# Altium PCB 电源控制板.PcbDoc
Units mil, origin at the board's own origin, x right, y up, seen from the top; angles counter-clockwise.
Board outline 3890 x 2720 mil, 2 copper layers (Top Layer, Bottom Layer); 36 components, 24 nets, 214 pads, 29 vias.
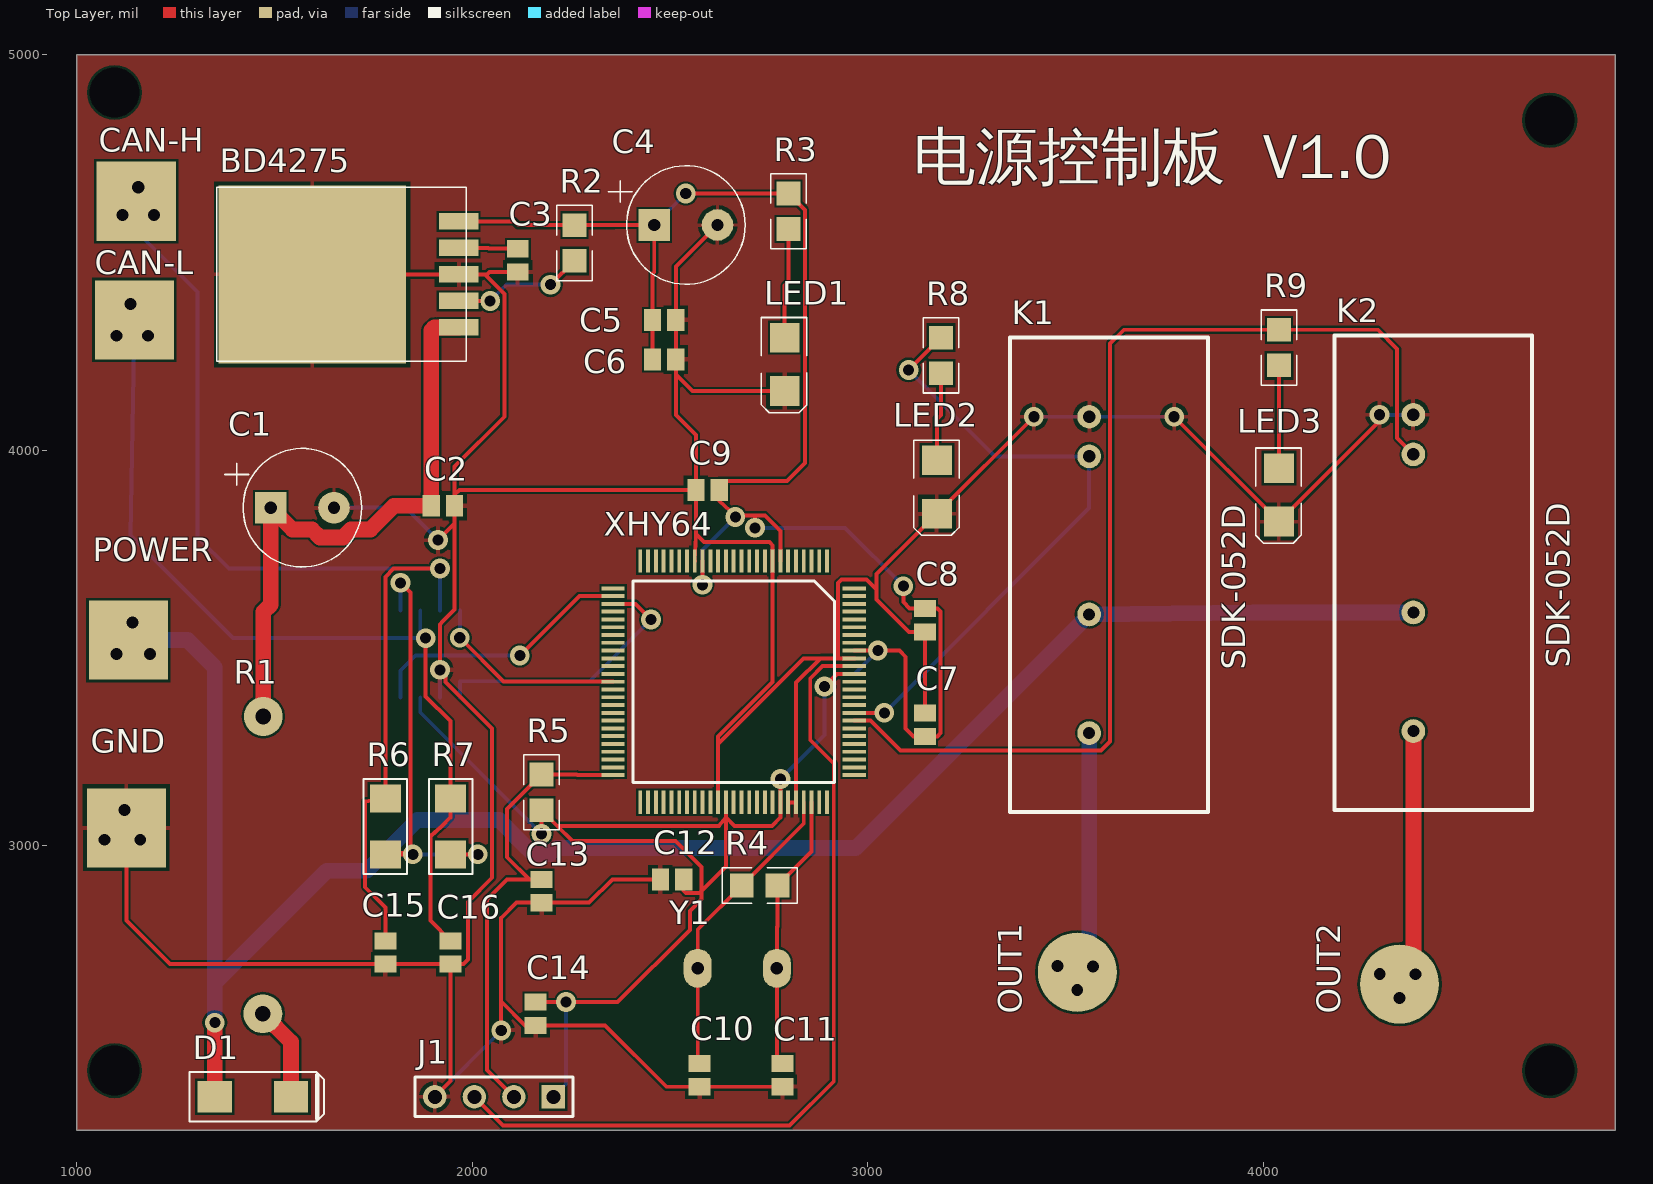
[diagram p0: Top Layer view]
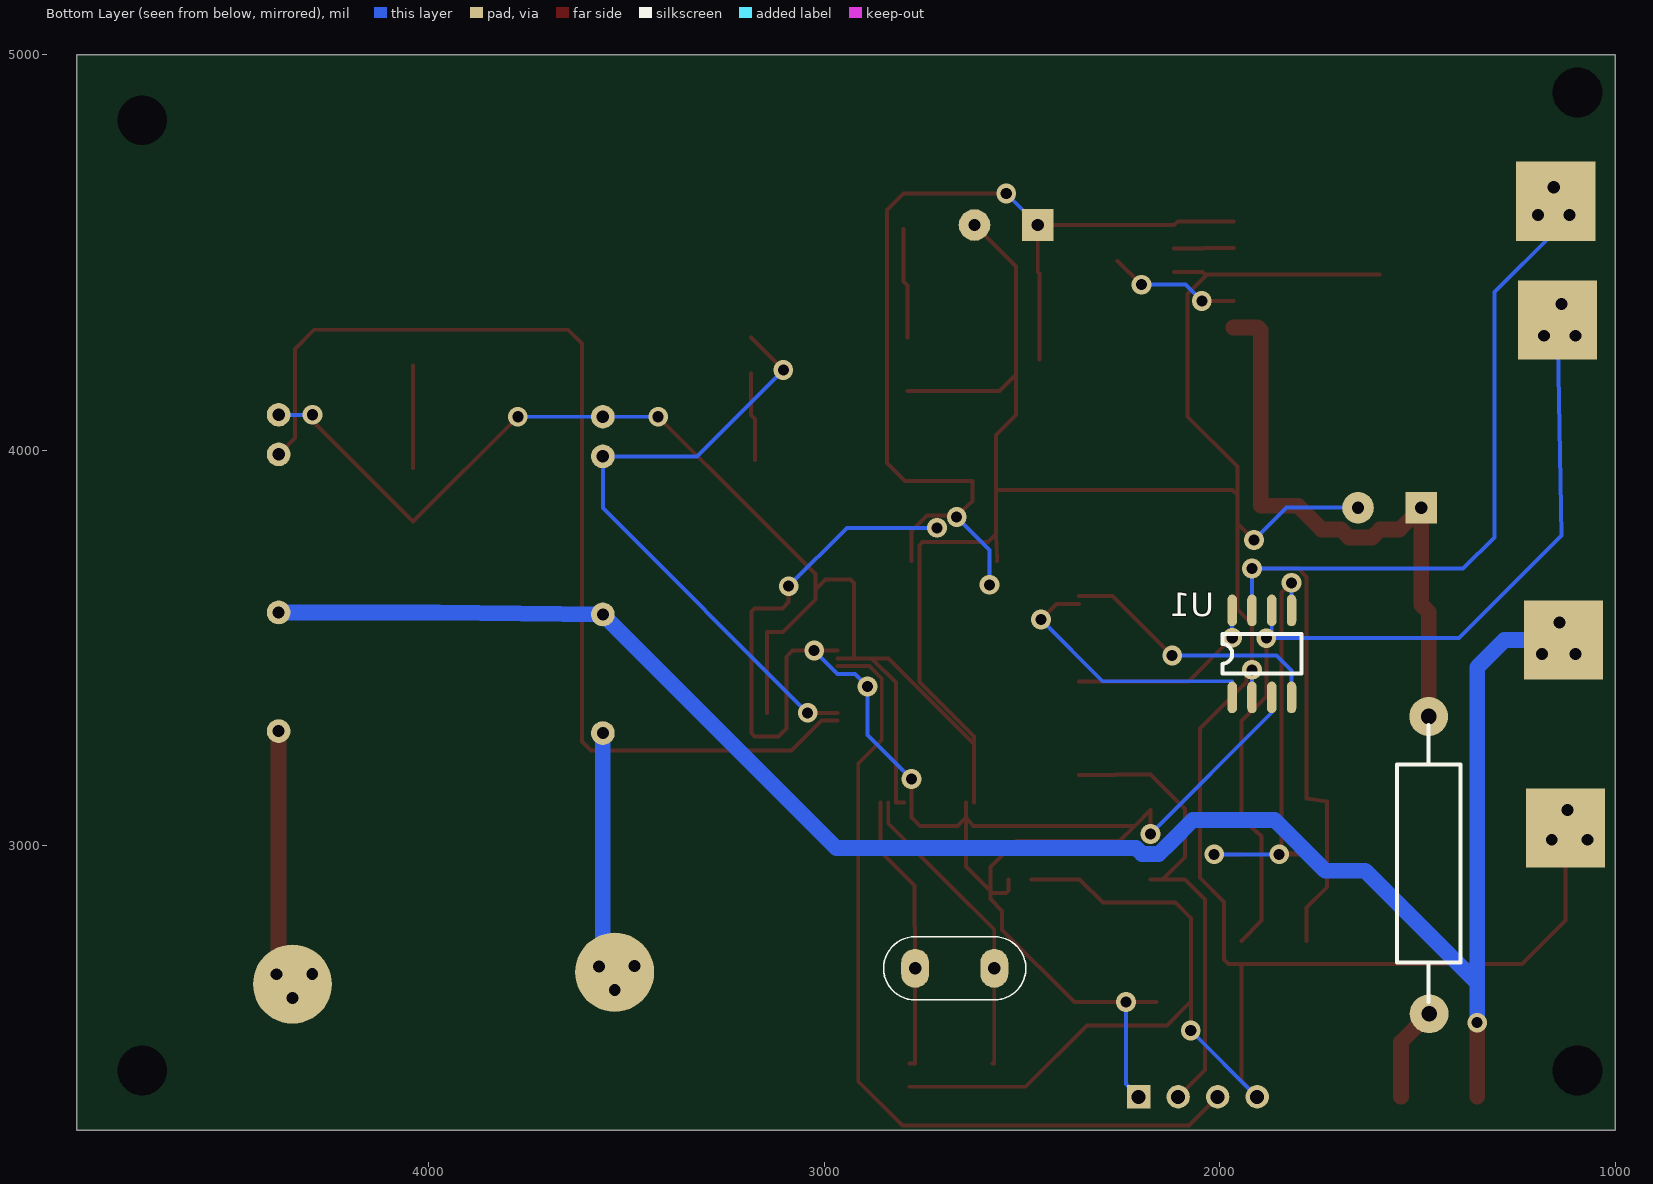
[diagram p1: Bottom Layer view, seen from below]

## Layer stack, top to bottom
Top Solder: solder mask 0.4, Solder Resist, Dk 3.5
Top Layer: signal copper 1.4
Dielectric 1: dielectric 12.6, FR-4, Dk 4.8
Bottom Layer: signal copper 1.4
Bottom Solder: solder mask 0.4, Solder Resist, Dk 3.5

## Board outline
1000,5000 1000,2280 4890,2280 4890,5000

## Design rules (kind name [scope] priority, off if disabled: settings)
Clearance [All] p1: gap=6 ignorepadtopadclearanceinfootprint=TRUE except(5.98: Arc-Text Arc-Hole Track-Text Track-Hole SMDPad-Hole THPad-Hole Via-Hole Fill-Hole Poly-Hole Region-Hole Text-Hole)
HoleSize [All] p1: absolutevalues=TRUE maxlimit=150 minlimit=1 maxpercent=80.000 minpercent=20.000
HoleToHoleClearance [All] p1: gap=5 allowstackedmicrovias=TRUE
MinimumSolderMaskSliver [All] p1: minsoldermaskwidth=1
PolygonConnect [All] p1: connectstyle=Relief reliefconductorwidth=10 reliefentries=4 polygonreliefangle="90 Angle" airgapwidth=10
RoutingVias [All] p1: holewidth=28 width=50 viastyle="Through Hole" minholewidth=28 minwidth=50 maxholewidth=28 maxwidth=50
SilkToSilkClearance [All] p1: silktosilkclearance=5
SilkToSolderMaskClearance [IsPad] p1 off: minsilkscreentomaskgap=4 clearancetoexposedcopper=TRUE
SolderMaskExpansion [All] p1: expansion=4
Width [All] p1: maxlimit=80 minlimit=10 preferedwidth=10
25 further rules are at their usual default settings.

## Components (designator, comment, footprint, x,y, rotation, side; value= is the part's Value field where it differs from the comment)
BD4275 "BD4275" TO-263 1935.03,4445.5 r0 top
C1 "100UF/50V" RB.1/.25 1490,3855 r0 top
C2 "104" C0805 1925.47,3860 r180 top value=50V-104-0805
C3 "104" C0805 2115,4480.47 r90 top value=50V-104-0805
C4 "470UF/16V" RB.1/.25 2460,4570 r0 top
C5 "104" C0805 2485,4330 r180 top value=50V-104-0805
C6 "104" C0805 2485,4230 r180 top value=50V-104-0805
C7 "104" C0805 3145,3306.3 r90 top value=50V-104-0805
C8 "104" C0805 3145,3570.47 r270 top value=50V-104-0805
C9 "104" C0805 2595,3900 r0 top value=50V-104-0805
C10 "22P" C0805 2574.61,2420 r90 top value=50V-22P-0805
C11 "22P" C0805 2784.61,2420 r270 top value=50V-22P-0805
C12 "104" C0805 2505,2915 r180 top value=50V-104-0805
C13 "104" C0805 2175,2885.47 r90 top value=50V-102-0805
C14 "104" C0805 2160,2575 r90 top value=50V-104-0805
C15 "47P-100V" C0805 1780,2730 r90 top value=100V-47P-0805
C16 "47P-100V" C0805 1945,2730 r90 top value=100V-47P-0805
D1 "M7" M7-A 1445,2365 r0 top
J1 "SPI4" HDR1X4 2205,2365 r180 top
K1 "SDK-052D" SDK-052D 3560,4085 r0 top
K2 "SDK-052D" SDK-052D 4380,4090 r0 top
LED1 "R" 1206-2 2790,4150 r90 top
LED2 "R" 1206-2 3175,3840 r90 top
LED3 "R" 1206-2 4040,3820 r90 top
R1 "8R2-2W" 2WR 1471.2,2555.1 r270 top
R2 "4K7" 0805 2258.44,4479.72 r90 top value="4K7-0805- 5%"
R3 "510Ω" 0805_2 2800,4560 r90 top value="510-0805- 5%"
R4 "1M" 0805 2771.26,2900 r180 top value=1M-0805-5%
R5 "10K" 0805 2174.61,3179.72 r270 top value=10K-0805-5%
R6 "62R-J" 1206 1780,3049.13 r90 top value=62R-1206-1%
R7 "62R-J" 1206 1945,3049.13 r90 top value=62R-1206-1%
R8 "1KΩ" 0805_2 3185.39,4195.28 r90 top value="1KΩ-0805- 5%"
R9 "1KΩ" 0805_2 4040.39,4215.28 r90 top value="1KΩ-0805- 5%"
U1 "TJA1040" SO-8 1895,3555 r90 top
XHY64 "XHY64" QUAD100 2897.16,3720 r270 top
Y1 "4M" 16M 2570,2690 r90 top

## Footprints (in the part's own frame and the unit in brackets; to place one, negate y for a bottom-side part, rotate by r counter-clockwise, add the part's x,y. Pads: shape width x height; smd on the part's side, far side on the other; paste and mask are expansions set on the pad)
2WR [mm]
  round 2.5 hole 1: 1(-0.505,-0.03) 2(-19.604,0)
16M [mm]
  oval 2.5x1.8 hole 0.8: 12(0,0) 13(0,-5.08)
0805 [mil]
  rect 60x60 smd: 1(-0.28,0.39) 2(89.72,0.39)
  silkscreen extent -50,-45 140,45
0805_2 [mil]
  rect 60x60 smd: 1(-0.28,0.39) 2(89.72,0.39)
  silkscreen extent -50,-45 140,45
1206 [mm]
  rect 1.8x2 smd: 1(-1.8,0) 2(1.8,0)
  silkscreen extent -3.05,-1.4 3.05,1.4
1206-2 [mil]
  rect 75x75 smd: 5(135,0) 6(0,0)
  silkscreen extent -55,-56 186,59
C0805 [mm] "Chip Capacitor, Body 2.0x1.3mm, IPC High Density"
  rect 1.1x1.4 smd: 1(-0.75,0) 2(0.75,0)
  body extent -1.1,-0.72 1.1,0.72, height 1.4
HDR1X4 [mm] "Connector; Header; 4 Position"
  rect 1.5x1.5 hole 0.9: 1(0,0)
  round 1.5 hole 0.9: 2(2.54,0) 3(5.08,0) 4(7.62,0)
  silkscreen extent -1.27,-1.27 8.89,1.27
M7-A [mm]
  rect 2.2x2 smd: 1(-2.45,0) 2(2.45,0)
  silkscreen extent -4.06,-1.6 4.57,1.6
QUAD100 [mm]
  rect 1.5x0.25 smd: 1(0,0) 2(0,-0.5) 3(0,-1) 4(0,-1.5) 5(0,-2) 6(0,-2.5) 7(0,-3) 8(0,-3.5) 9(0,-4) 10(0,-4.5) 11(0,-5) 12(0,-5.5) 13(0,-6) 14(0,-6.5) 15(0,-7) 16(0,-7.5) 17(0,-8) 18(0,-8.5) 19(0,-9) 20(0,-9.5) 21(0,-10) 22(0,-10.5) 23(0,-11) 24(0,-11.5) 25(0,-12) 51(15.5,-12) 52(15.5,-11.5) 53(15.5,-11) 54(15.5,-10.5) 55(15.5,-10) 56(15.5,-9.5) 57(15.5,-9) 58(15.5,-8.5) 59(15.5,-8) 60(15.5,-7.5) 61(15.5,-7) 62(15.5,-6.5) 63(15.5,-6) 64(15.5,-5.5) 65(15.5,-5) 66(15.5,-4.5) 67(15.5,-4) 68(15.5,-3.5) 69(15.5,-3) 70(15.5,-2.5) 71(15.5,-2) 72(15.5,-1.5) 73(15.5,-1) 74(15.5,-0.5) 75(15.5,0)
  rect 0.25x1.5 smd: 26(1.75,-13.75) 27(2.25,-13.75) 28(2.75,-13.75) 29(3.25,-13.75) 30(3.75,-13.75) 31(4.25,-13.75) 32(4.75,-13.75) 33(5.25,-13.75) 34(5.75,-13.75) 35(6.25,-13.75) 36(6.75,-13.75) 37(7.25,-13.75) 38(7.75,-13.75) 39(8.25,-13.75) 40(8.75,-13.75) 41(9.25,-13.75) 42(9.75,-13.75) 43(10.25,-13.75) 44(10.75,-13.75) 45(11.25,-13.75) 46(11.75,-13.75) 47(12.25,-13.75) 48(12.75,-13.75) 49(13.25,-13.75) 50(13.75,-13.75) 76(13.75,1.75) 77(13.25,1.75) 78(12.75,1.75) 79(12.25,1.75) 80(11.75,1.75) 81(11.25,1.75) 82(10.75,1.75) 83(10.25,1.75) 84(9.75,1.75) 85(9.25,1.75) 86(8.75,1.75) 87(8.25,1.75) 88(7.75,1.75) 89(7.25,1.75) 90(6.75,1.75) 91(6.25,1.75) 92(5.75,1.75) 93AD(5.25,1.75) 94AD(4.75,1.75) 95AD(4.25,1.75) 96AD(3.75,1.75) 97AD(3.25,1.75) 98AD(2.75,1.75) 99AD(2.25,1.75) 100AD(1.75,1.75)
  silkscreen extent 1.28,-12.46 14.21,0.47
RB.1/.25 [mil]
  rect 80x80 hole 31.5: 1(0,0)
  round 80 hole 31.5: 2(160,0)
  silkscreen extent -116,-150 230,150
SDK-052D [mil]
  round 60 hole 30: 1(0,-500) 2(0,-800)
  round 60 hole 31.5: 3(0,-100) 4(0,0)
  silkscreen extent -200,-1000 300,200
SO-8 [mil]
  oval 80x24 smd far side: 1(-179.75,-73.19) 2(-179.75,-23.19) 3(-179.75,26.81) 4(-179.75,76.81) 5(40.25,76.81) 6(40.25,26.81) 7(40.25,-23.19) 8(40.25,-73.19)
TO-263 [mil]
  rect 475x450 smd: 0(-340.03,-0.5)
  rect 100x42 smd: 1(29.97,-134.5) 2(29.97,-67.49) 3(29.97,-0.49) 4(29.97,66.5) 5(29.97,133.51)
  silkscreen extent -582,-220 50,220

## Part data
C1: library part C470UF035S, "100UF      50V"
C2 C3 C5 C6 C7 C8 C9 C12 C14: library part C104_0805, "104     50V        10%   C0805"
C4: library part C470UF016S, "100UF      50V      CD10X10D5"
C10 C11: library part C22P_0805, "22P     50V        10%   C0805"
C13: library part C102_0805, "104     50V        10%   C0805"
C15 C16: library part C47P_100V_0805, "47P    100V        10%   C0805"
D1: library part TVS
J1: library part "Header 4", "单排针，Header, 4-Pin", LatestRevisionDate=17-Jul-2002, LatestRevisionNote="Re-released for DXP Platform.", Publisher="Altium Limited"
K1 K2: library part Relay-SPST, LatestRevisionDate=17-Jul-2002, LatestRevisionNote="Re-released for DXP Platform.", PackageReference=MODULE4, Published=24-Mar-1999, Publisher="Altium Limited"
LED1 LED2 LED3: library part LED_R, "LED_R"
R1: library part R8R22W, "8R2                                2W"
R2: library part R4K7_0805_5%, "4K7     1/8W    5%   R0805"
R3: library part R4K7_0805_5%, "510Ω    5%   R0805"
R4: library part R1M_0805_5%, "1M    1/8W    5%   R0805"
R5: library part R10K_0805_5%, "10K     1/8W    5%   R0805"
R6 R7: library part R62R_1206_1%, "62R    1/4W     1%   R1206"
R8 R9: library part R4K7_0805_5%, "1KΩ    5%   R0805"
U1: library part TJA1042, "CAN驱动芯片"
Y1: library part XTAL, "晶体，4M"

## Free pads (board coordinates)
  round 60 hole 125.98: 1(1095,4905) 2(1095,2431.2) 3(4725,2431.2) 4(4725,4835)
  rect 200x200 all layers, no hole: 1(1150,4630) 8(1145,4330) 12(1130,3520) 16(1125,3045)
  round 60 hole 30: 2(1195,4595) 4(1115,4595) 5(1135,4370) 6(1100,4290) 7(1180,4290) 9(1140,3565) 10(1100,3485) 11(1185,3485) 13(1120,3090) 14(1070,3015) 15(1160,3015) 17(3480,2695.94) 17(4295,2675.94) 18(3570,2695) 18(4385,2675) 19(3530,2635) 19(4345,2615)
  round 60 hole 31.5: 3(1155,4665)
  round 200 all layers, no hole: 20(3530,2680) 20(4345,2650)

## Via types
v1: diameter 50, hole 28, Top Layer to Bottom Layer, 29 vias

## Nets (pads, with @x,y where several pads share a name; then routed paths per layer and width w, separated by ;. In a path a pad name is that pad's centre, name@x,y a point inside that pad or via, vN(x,y) a via of type N, cw(c..) or ccw(c..) an arc to the next point about the centre after c; other vN are vias at no path point)
CAN_H: C15.2 pad.1@1150,4630 pad.2@1195,4595 pad.3@1155,4665 pad.4@1115,4595 R6.2 U1.7 | length 2830.9
  Top Layer w10: C15.2 1780,2844 1729,2895 1729,3112 R6.2 1780,3680 1801,3701 v1(1918.19,3701)
  Bottom Layer w10: pad.3@1155,4665 1155,4550 1305,4400 1305,3780 1384,3701 v1(1918.19,3701) U1.7
CAN_L: C16.2 pad.5 pad.6 pad.7 pad.8 R7.2 U1.6 | length 2310.5
  Top Layer w10: v1(1882,3525) 1882,3378 1945,3315 R7.2 1945,3072 1923,3050 1894,3024 1894,2810.53 C16.2
  Bottom Layer w10: pad.8 1135,3785 1395,3525 v1(1882,3525) 1868.19,3538.81 U1.6
CAN_唤醒: U1.4 XHY64.27 | length 683.5
  Top Layer w10: v1(2120,3481) 2270.42,3631.42 XHY64.27
  Bottom Layer w10: U1.4 1818.19,3443.19 1856,3481 v1(2120,3481)
GND: BD4275.0 BD4275.3 C1.2 C2.1 C3.1 C4.2 C5.1 C6.1 C7.2 C8.2 C9.1 C10.1 C11.2 C12.2 C13.1 C14.1 C15.1 C16.1 J1.4 K1.4 K2.4 LED1.6 LED2.6 LED3.6 pad.13 pad.14 pad.15 pad.16 U1.2 XHY64.8 XHY64.18 XHY64.61 XHY64.70 XHY64.71 XHY64.91 | length 12171.2
  Top Layer w10: pad.16 1125,2810.53 1235.06,2700.47 C15.1 C16.1 ; BD4275.0 1779,4445 BD4275.3 2032,4445 ; J1.4 1945,2405 C16.1 ; v1(1913,3773) 1955,3815 ; v1(1918,3445) 1918,3560 1925,3567 1955,3597 1955,3815 ; v1@1930.56,3445.57 1932,3414 2050,3296 2050,2919 1989,2858 1989,2712 1977.47,2700.47 C16.1 ; v1(2073,2533) 2073,2605.73 ; C3.1 2042.94,4450.94 2037,4445 2032,4445 ; C12.2 2354.06,2915 2295,2855.94 C13.1 2112,2855.94 2073,2816.94 2073,2605.73 ; XHY64.18 2565.47,3788.18 ; C4.2 2514.53,4464.53 C5.1 C6.1 2514.53,4192 ; XHY64.61 2621.57,3257.51 ; C11.2 C10.1 2491,2390.47 2336,2545.47 C14.1 2133.26,2545.47 2073,2605.73 ; LED1.6 2556.53,4150 2514.53,4192 ; XHY64.70 XHY64.71 2818.42,3412.36 2880,3473.94 ; XHY64.91 2925,3473.94 ; C7.2 C8.2 3104,3540.94 3022,3622.94 3022,3648 ; v1(3420,4085) LED2.6 3022,3687 3022,3648 ; v1(3775,4085) LED3.6 4294,4074 v1(4294,4090) ; 1955,3815 C2.1 1955,3888 ; 1955,3888 1955,3959 2081,4085 2081,4396 2032,4445 ; 1955,3888 1967,3900 C9.1 ; 2514.53,4192 2514.53,4089.94 2565.47,4039 C9.1 ; 2565.47,3788.18 C9.1 ; 2565.47,3788.18 2585.66,3768 2751.37,3768 2759.37,3760 XHY64.8 2759.37,3414.37 2621.57,3276.57 2621.57,3257.51 ; 2621.57,3257.51 2838,3473.94 2880,3473.94 ; 2880,3473.94 2925,3473.94 ; 2925,3473.94 2925,3664 2934,3673 2997,3673 3022,3648
  Bottom Layer w10: C1.2 1831,3855 v1(1913,3773) ; J1.4 v1(2073,2533) ; v1(1918,3445) 1918.19,3444.81 U1.2 ; v1(3420,4085) K1.4 v1(3775,4085) ; v1(4294,4090) K2.4
NetBD4275_1: BD4275.1 C1.1 C2.2 R1.2 | length 1521.4
  Top Layer w40: R1.2 1471.2,3591 1490,3609.8 C1.1 1545,3800 1594.25,3800 1614.25,3780 1672.75,3780 1692.75,3800 1742,3800 1802,3860 C2.2 1895.94,4302.94 1904,4311 BD4275.1
NetBD4275_2: BD4275.2 R2.1 | length 335.1
  Top Layer w10: BD4275.2 v1(2045,4378) ; v1(2197.6,4419) R2.1
  Bottom Layer w10: v1(2045,4378) 2086,4419 v1(2197.6,4419)
NetBD4275_4: BD4275.4 C3.2 | length 150.8
  Top Layer w10: BD4275.4 2040,4512 2042,4510 C3.2
NetD1_2: D1.2 R1.1 | length 239.6
  Top Layer w40: R1.1 1541.46,2503.54 D1.2
NetLED1_1: LED1.5 R3.1 | length 278.7
  Top Layer w10: LED1.5 2790,4417 2799.61,4426.61 R3.1
NetLED2_1: LED2.5 R8.1 | length 224.1
  Top Layer w10: LED2.5 3175,4079 3185,4089 R8.1
NetLED3_1: LED3.5 R9.1 | length 260
  Top Layer w10: LED3.5 4040,4084 R9.1
NetR6_1: R6.1 R7.1 U1.5 | length 1126.3
  Top Layer w10: v1(1818,3665) 1843,3640 1843,2984.64 R6.1 v1(1849.37,2978.27) ; R7.1 v1(2013.73,2978.27)
  Bottom Layer w10: v1(1818,3665) 1818.19,3664.81 U1.5 ; v1(1849.37,2978.27) v1(2013.73,2978.27)
TJA1040_STB: U1.8 XHY64.38 | length 502.9
  Top Layer w10: v1(1968.19,3526) 2079.31,3414.88 XHY64.38
  Bottom Layer w10: v1(1968.19,3526) U1.8
TXCAN: U1.1 XHY64.28 | length 701.8
  Top Layer w10: XHY64.28 2412.27,3611.73 v1(2452,3572)
  Bottom Layer w10: U1.1 1968.19,3416 2296,3416 v1(2452,3572)
VCC5V0: BD4275.5 C4.1 C5.2 C6.2 C7.1 C8.1 C9.2 C12.1 C14.2 J1.1 R2.2 R3.2 R5.2 U1.3 XHY64.7 XHY64.17 XHY64.62 XHY64.69 XHY64.89 XHY64.92 | length 7512.6
  Top Layer w10: BD4275.5 2106,4579 2115.55,4569.45 R2.2 2358,4569.45 2358.55,4570 C4.1 2460,4451.53 2455.47,4447 C5.2 C6.2 ; C14.2 v1(2237,2604.53) 2367.53,2604.53 2550,2787 2550,2835 2580,2865 2580,2885.74 ; v1(2175,3030) R5.2 2214.74,3050.26 ; C12.1 2534.53,2886.23 2540.02,2880.74 2575,2880.74 2580,2885.74 ; v1(2539.72,4649.72) R3.2 2841,4608.33 2841,3968 2796,3923 2624.53,3923 C9.2 2624.53,3872 v1@2665,3835.53 ; v1(2582,3660) 2582.2,3660.2 XHY64.17 ; XHY64.62 2641.26,3072 ; v1(2665,3831.53) v1@2665,3835.53 ; v1(2715,3804) 2715,3835.53 ; v1(2779,3169) 2779.05,3168.95 XHY64.69 2779.05,3072 2757.31,3050.26 2663,3050.26 2641.26,3072 ; XHY64.7 2779.05,3796.16 2739.68,3835.53 2715,3835.53 ; v1(2890.53,3402.57) 2922.53,3434.57 XHY64.89 ; XHY64.92 v1(3025.59,3493.62) 3080.38,3493.62 3096,3478 3096,3296 3115.23,3276.77 C7.1 3176,3276.77 3184,3284.77 3184,3592 3176,3600 C8.1 3106.04,3600 3090.04,3616 v1(3090.04,3656.47) ; 2214.74,3050.26 2253,3012 2514,3012 2580,2946 2580,2885.74 ; 2214.74,3050.26 2624,3050.26 2641.26,3072 ; 2580,2885.74 2641.26,2947 2641.26,3072 ; v1@2665,3835.53 2715,3835.53
  Bottom Layer w10: U1.3 1868.19,3336.81 v1(2175,3030) ; J1.1 2237,2397 v1(2237,2604.53) ; C4.1 v1(2539.72,4649.72) ; v1(2582,3660) 2582,3748.53 v1(2665,3831.53) ; v1(2715,3804) 2942.51,3804 v1(3090.04,3656.47) ; v1(2779,3169) 2890.54,3280.54 v1(2890.53,3402.57) 2922.53,3434.57 2966.53,3434.57 v1(3025.59,3493.62)
VCC13V: D1.1 K1.1 K2.1 pad.9 pad.10 pad.11 pad.12 | length 4822
  Top Layer w40: D1.1 v1(1348.54,2552.54)
  Bottom Layer w40: pad.12 1280,3520 1348.54,3451.46 1348.54,2653.54 ; v1(1348.54,2552.54) 1348.54,2653.54 ; K2.1 3975,3590 K1.1 2969,2994 2211.12,2994 2196.12,2979 2153.88,2979 2124,3008.88 2124,3009 2068,3065 1861,3065 1732.89,2936.89 1631.89,2936.89 1348.54,2653.54
VCC13V_OUT1: K1.2 pad.17@3480,2695.94 pad.18@3570,2695 pad.19@3530,2635 pad.20@3530,2680 | length 617.4
  Bottom Layer w40: pad.20@3530,2680 3560,2710 K1.2
VCC13V_OUT2: K2.2 pad.17@4295,2675.94 pad.18@4385,2675 pad.19@4345,2615 pad.20@4345,2650 | length 761.3
  Top Layer w10: pad.20@4295,2675.94 4350.47,2620.47 4385,2655 pad.18@4385,2675
  Top Layer w40: pad.18@4380,2675.94 K2.2
X1-1: K1.3 R8.2 XHY64.84 | length 1601.6
  Top Layer w10: XHY64.84 v1(3042,3336.14) ; v1(3103.5,4203.5) R8.2
  Bottom Layer w10: v1(3042,3336.14) 3560,3854.14 K1.3 3322,3985 v1(3103.5,4203.5)
X1-2: K2.3 R9.2 XHY64.83 | length 2737.5
  Top Layer w10: XHY64.83 3007,3316.46 3082.46,3241 3590,3241 3613,3264 3613,4270 3648,4305 R9.2 4290,4305 4339,4256 4339,4031 K2.3
X1_MCU: C10.2 R4.2 XHY64.72 Y1.12 | length 775.9
  Top Layer w10: C10.2 2570,2449.53 Y1.12 2570,2788.07 R4.2 2838.11,3056.18 XHY64.72
X2_MCU: C11.1 R4.1 XHY64.73 Y1.13 | length 711.2
  Top Layer w10: C11.1 2770,2449.53 Y1.13 2770,2794 2771.54,2795.54 R4.1 2857.79,2985.87 XHY64.73
编程1: C13.2 J1.2 R5.1 XHY64.50 | length 1191.8
  Top Layer w10: J1.2 2037,2433 2037,2863.96 2088.04,2915 2144,2915 ; C13.2 2144,2915 ; XHY64.50 2265.34,3178.66 2264,3180 R5.1 2088.04,3093.04 2088.04,2970.96 2144,2915
编程2: J1.3 XHY64.90 | length 2153.7
  Top Layer w10: J1.3 2078,2292 2802,2292 2914,2404 2914,3208 2854.53,3267.47 2854.53,3422.86 2885.92,3454.25 XHY64.90
pads on no net: XHY64.1 XHY64.2 XHY64.3 XHY64.4 XHY64.5 XHY64.6 XHY64.9 XHY64.10 XHY64.11 XHY64.12 XHY64.13 XHY64.14 XHY64.15 XHY64.16 XHY64.19 XHY64.20 XHY64.21 XHY64.22 XHY64.23 XHY64.24 XHY64.25 XHY64.26 XHY64.29 XHY64.30 XHY64.31 XHY64.32 XHY64.33 XHY64.34 XHY64.35 XHY64.36 XHY64.37 XHY64.39 XHY64.40 XHY64.41 XHY64.42 XHY64.43 XHY64.44 XHY64.45 XHY64.46 XHY64.47 XHY64.48 XHY64.49 XHY64.51 XHY64.52 XHY64.53 XHY64.54 XHY64.55 XHY64.56 XHY64.57 XHY64.58 XHY64.59 XHY64.60 XHY64.63 XHY64.64 XHY64.65 XHY64.66 XHY64.67 XHY64.68 XHY64.74 XHY64.75 XHY64.76 XHY64.77 XHY64.78 XHY64.79 XHY64.80 XHY64.81 XHY64.82 XHY64.85 XHY64.86 XHY64.87 XHY64.88 XHY64.93AD XHY64.94AD XHY64.95AD XHY64.96AD XHY64.97AD XHY64.98AD XHY64.99AD XHY64.100AD

## Polygon pours and split planes (outlines as drawn)
GND on Top Layer "GND_L01_P006" (solid, remove dead copper, pour order 6): 1000,2280 4889.99,2280 4889.99,4999.99 1000,5000
no net on Top Layer "Top Layer-No Net" (solid, pour order 4): 995,4995
no net on Top Layer "Top Layer-No Net 1" (solid, pour order 2): 1000,5000
no net on Top Layer "Top Layer-No Net 2" (solid, pour order 0): 1000,5000

## Silkscreen, mask and mechanical layers (free items; w line width, h text height)
Top Overlay:
  text "CAN-H" at 1055,4755 h60
  text "电源控制板  V1.0" at 3115,4649.72 h196.85
  text "CAN-L" at 1045,4445 h60
  text "POWER" at 1040,3720 h60
  text "GND" at 1035,3235 h60
  text "OUT1" at 3390,2575 h60 r90
  text "OUT2" at 4195,2575 h60 r90
Mechanical 1:
  lines w6: 997,2280 ccw(c1000,2280) 1000,2277 ; 997,2280 ccw(c1000,2280) 1000,2277 ; 997,2280 997,5000 ; 997,5000 cw(c1000,5000) 1000,5003 ; 997,5000 cw(c1000,5000) 1000,5003 ; 1000,2277 4890,2277 ; 1000,5003 4890,5003 ; 4890,2277 ccw(c4890,2280) 4893,2280 ; 4890,2277 ccw(c4890,2280) 4893,2280 ; 4890,5003 cw(c4890,5000) 4893,5000 ; 4890,5003 cw(c4890,5000) 4893,5000 ; 4893,2280 4893,5000